# Altium PCB SC_generator.PcbDoc
Units mm, origin at the board's own origin, x right, y up, seen from the top; angles counter-clockwise.
Board outline 79.97 x 50 mm, 2 copper layers (Top Layer, Bottom Layer); 45 components, 27 nets, 157 pads, 46 vias.
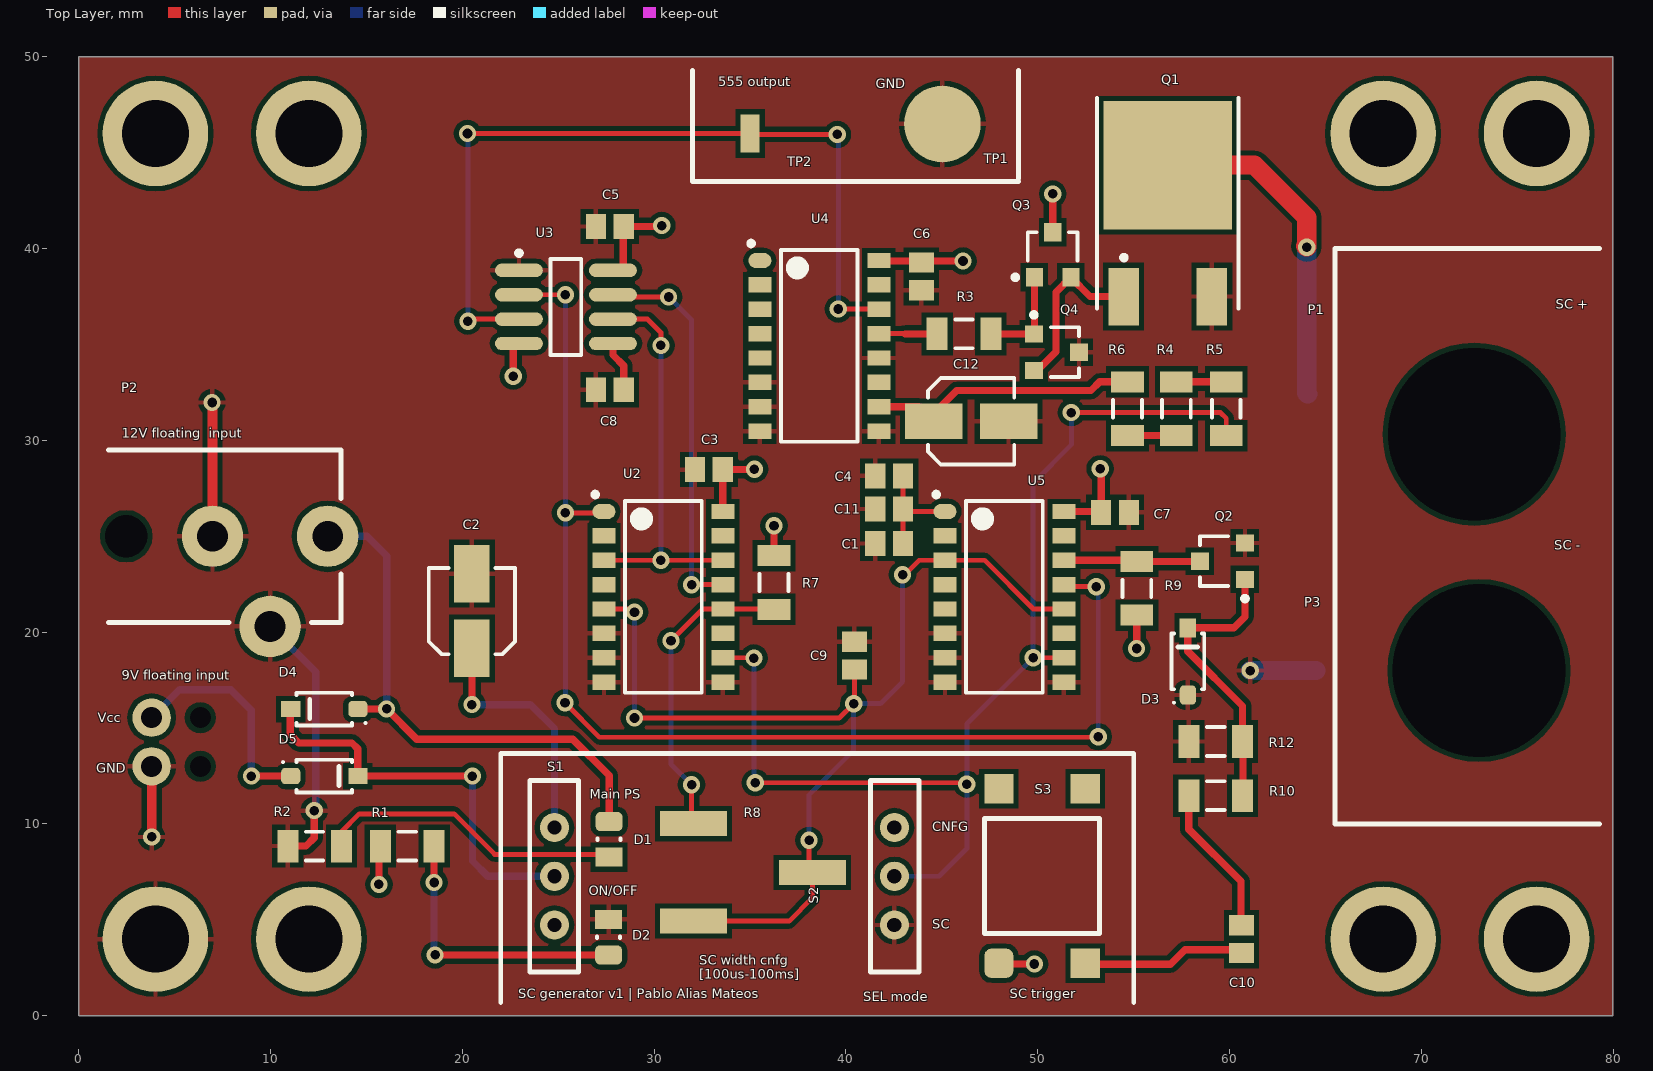
[diagram p0: Top Layer view]
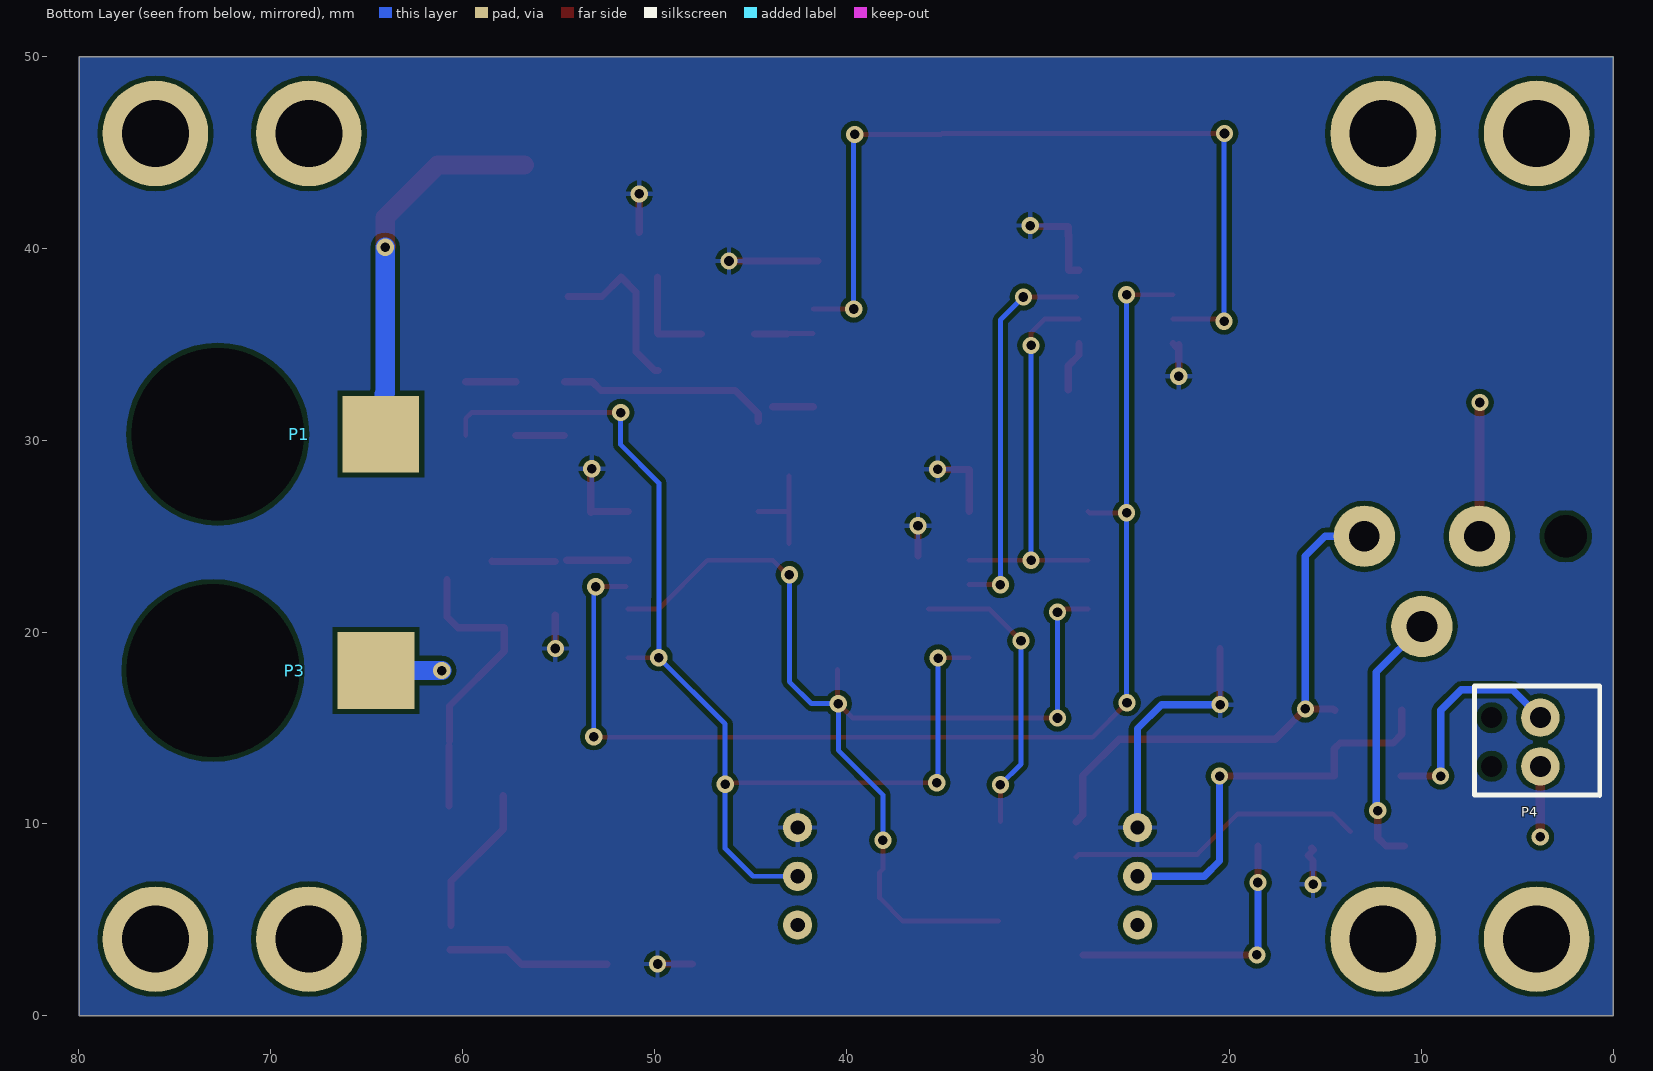
[diagram p1: Bottom Layer view, seen from below]
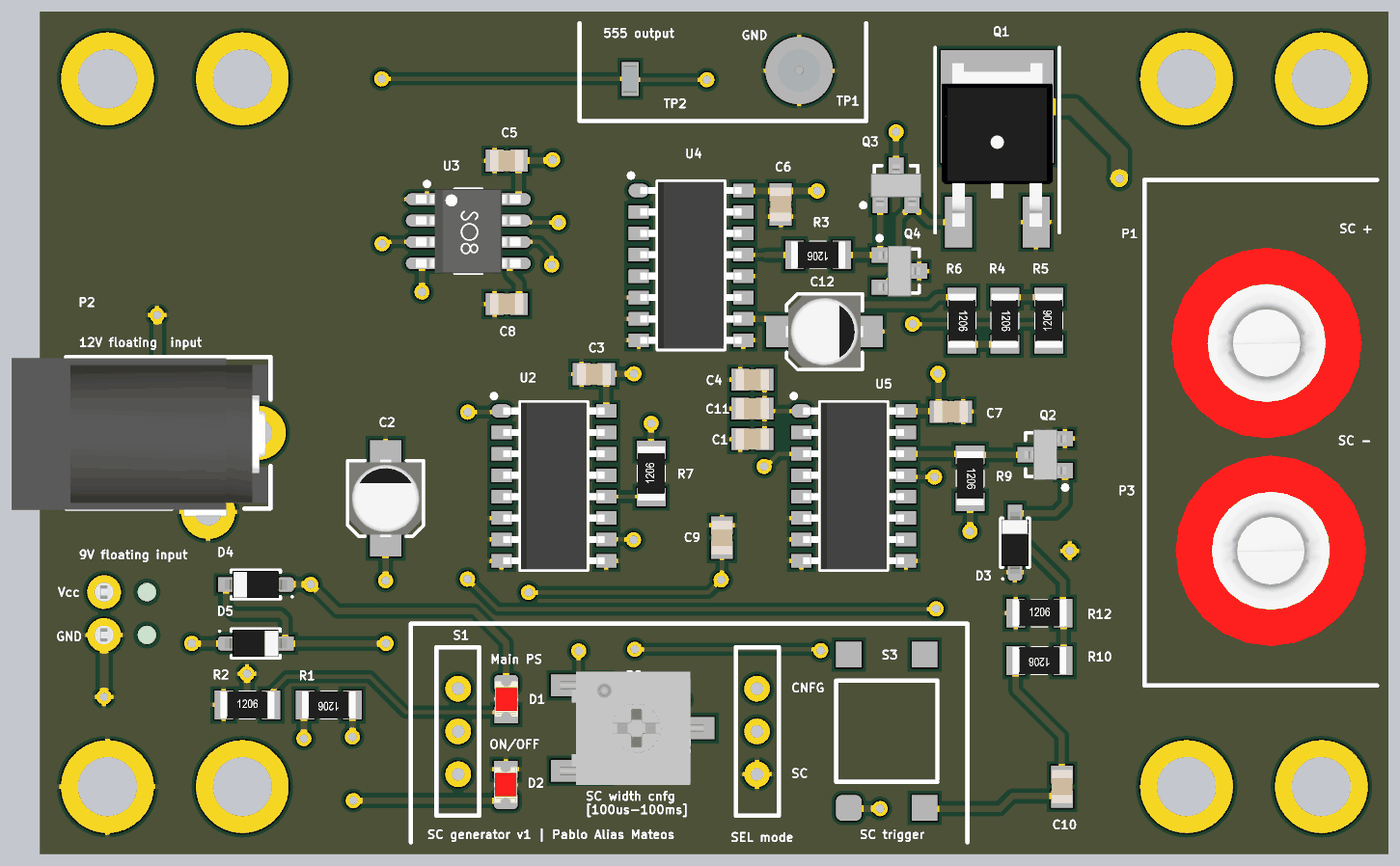
[diagram p2: 3D render of the assembled board from above, using the file's embedded part models]

## Layer stack, top to bottom
Top Solder: solder mask 0.0102, Solder Resist, Dk 3.5
Top Layer: signal copper 0.0356
Dielectric 1: dielectric 0.32, FR-4, Dk 4.8
Bottom Layer: signal copper 0.0356
Bottom Solder: solder mask 0.0102, Solder Resist, Dk 3.5

## Board outline
0,0 0,50 79.975,50 79.975,0

## Design rules (kind name [scope] priority, off if disabled: settings)
Clearance [All] p1: gap=0.254
PolygonConnect PolygonConnect_1 [All] p1: connectstyle=Relief reliefconductorwidth=0.254 reliefentries=4 polygonreliefangle="90 Angle" airgapwidth=0.254
PolygonConnect MOS_GND [HasFootprint('TO-252/DPAK')] p2: connectstyle=Relief reliefconductorwidth=0.508 reliefentries=4 polygonreliefangle="90 Angle" airgapwidth=0.254
RoutingVias [All] p1: holewidth=0.5 width=0.9 viastyle="Through Hole" minholewidth=0.5 minwidth=0.9 maxholewidth=0.5 maxwidth=0.9
SolderMaskExpansion [All] p1: expansion=0.102
Width [All] p1: maxlimit=1 minlimit=0.254 preferedwidth=0.381
30 further rules are at their usual default settings.

## Components (designator, comment, footprint, x,y, rotation, side; value= is the part's Value field where it differs from the comment)
C1 "Cap Semi" CAP_0805_L 42.25,24.625 r0 top
C2 "Cap Electrol" CAPAE5043X55M 20.498,21.104 r90 top
C3 "Cap Semi" CAP_0805_L 32.85,28.475 r0 top
C4 "Cap Semi" CAP_0805_L 42.25,28.15 r0 top
C5 "Cap Semi" CAP_0805_L 27.686,41.148 r0 top
C6 "Cap Semi" CAP_0805_L 43.925,38.55 r90 top
C7 "Cap Semi" CAP_0805_L 54.025,26.25 r180 top
C8 "Cap Semi" CAP_0805_L 27.686,32.639 r0 top
C9 "Cap Semi" CAP_0805_L 40.438,18.773 r270 top
C10 "Cap Semi" CAP_0805_L 60.617,3.995 r90 top
C11 "Cap Semi" CAP_0805_L 42.25,26.425 r0 top
C12 "Cap Electrol" CAPAE5043X55M 46.525,31 r0 top
D1 "CHIPLED OSRAM 0805" CHIPLED_0805_N 27.65,9.2 r270 top
D2 "CHIPLED OSRAM 0805" CHIPLED_0805_N 27.625,4.1 r90 top
D3 "1N4148W" SOD-123_M 57.825,18.475 r90 top
D4 "SBR0560S1Q-7" SOD-123_M 12.803,15.993 r180 top
D5 "SBR0560S1Q-7" SOD-123_M 12.8,12.5 r0 top
P1 "SKT_4mm" "4MM SAFETY JACK" 72.75,30.325 r180 top
P2 "JCK_F_5.5_2.1" PJ-059A 9.975,25 r0 top
P3 "SKT_4mm" "4MM SAFETY JACK" 73,18 r180 top
P4 "TERM BLOCK 2.54MM 2POS" "TERM BLOCK 2.54MM 2POS" 3.8,14.275 r270 bottom
Q1 "IPD12CN10NGATMA1" TO-252/DPAK 56.775,40.925 r0 top
Q2 "PMMT491A" SOT-23 59.625,23.7 r90 top
Q3 "PMMT491A" SOT-23 50.775,39.675 r0 top
Q4 "PBHV9115T" SOT-23 50.971,34.596 r270 top
R1 "Res semi" RES_1206_N 17.125,8.85 r180 top
R2 "Res semi" RES_1206_N 12.3,8.85 r0 top
R3 "Res semi" RES_1206_N 46.15,35.55 r180 top
R4 "Res semi" RES_1206_N 57.225,31.65 r270 top
R5 "Res semi" RES_1206_N 59.825,31.65 r90 top
R6 "Res semi" RES_1206_N 54.675,31.65 r270 top
R7 "Res semi" RES_1206_N 36.248,22.588 r90 top
R8 "Pot SMD" 3361P_POT 35.15,7.475 r270 top
R9 "Res semi" RES_1206_N 55.166,22.287 r270 top
R10 "Res semi" RES_1206_N 59.275,11.475 r180 top
R12 "Res semi" RES_1206_N 59.275,14.3 r0 top
S1 "SW SPST 500mA 24V" DIP_3x1_slide_switch 24.8,7.275 r270 top
S2 "SW SPST 500mA 24V" DIP_3x1_slide_switch 42.525,7.275 r90 top
S3 "BUTTON SPST" "BUTTON SPDT" 50.22,7.289 r180 top
TP1 "TEST_POINT" TP_SMD_pin 45.025,46.5 r0 top
TP2 "TEST_POINT" TP_SMD 35,46 r90 top
U2 "HEF4052BT,653" SO16_M 30.48,21.844 r0 top
U3 "LM555" SO-8_M 25.4,36.957 r0 top
U4 "HEF4052BT,653" SO16_M 38.608,34.93 r0 top
U5 "HEF4052BT,653" SO16_M 48.26,21.844 r0 top

## Footprints (in the part's own frame and the unit in brackets; to place one, negate y for a bottom-side part, rotate by r counter-clockwise, add the part's x,y. Pads: shape width x height; smd on the part's side, far side on the other; paste and mask are expansions set on the pad)
"4MM SAFETY JACK" [mm] "Banana Jack Connector Standard Banana Solder Cup"
  rect 4x4 smd far side: 1(8.5,0)
  round 7 hole 9 unplated mask+0.102: MH(0,0)
  body extent -5.65,-5.65 5.65,5.65, height 8.3
3361P_POT [mm] "3361P potentiometer SMD"
  rect 1.3x3.5 smd: 1(-2.54,-3.1) 2(0,3.1) 3(2.54,-3.1)
  body extent -3.34,-4.32 3.36,4.22, height 5.26
"BUTTON SPDT" [mm]
  rrect50% 1.524x1.524 smd: 1(2.25,4.55)
  rect 1.524x1.524 smd: 2(2.25,-4.55) 3(-2.25,4.55) 4(-2.25,-4.55)
  silkscreen extent -3,-3 3,3, body extent -3.05,-2.92 2.92,2.92, height 4.1
CAP_0805_L [mm]
  rect 1.05x1.3 smd: 1(-0.725,0) 2(0.725,0)
  body extent -1,-0.62 1,0.63, height 0.61
CAPAE5043X55M [mm] "Aluminum Electrolytic Capacitor, Body 4,30x4,30x5,50mm, IPC Low Density"
  rect 3x1.85 smd: 1(-1.95,0) 2(1.95,0)
  silkscreen extent -2.25,-2.25 2.25,2.25, body extent -2.3,-2.15 2.3,2.15, height 5.41
CHIPLED_0805_N [mm]
  rrect50% 1x1.4 smd: 1(-0.925,0)
  rect 1x1.4 smd: 2(0.925,0)
  silkscreen extent -0.05,-0.6 0.05,0.6, body extent -1.05,-0.67 1.05,0.68, height 0.9
DIP_3x1_slide_switch [mil] "Interruptor SIP, SPST, Pasante, Actuador Deslizante, 500 mA a 24 V, 2 vías, -40 ? +85°C, Ref 09.03290.01 EOZ"
  round 60 hole 29.53: 1(0,0) 2(-100,0) 3(100,0)
  silkscreen extent -197,-51 197,49, body extent -195,-50 195,50, height 209
PJ-059A [mm] "PJ-059A_jack_F_5.5_2.1"
  round 3.2 hole 1.6: 1(3,0) 2(-3,0) 3(0,-4.7)
  round 1 hole 2.2: MH(-7.5,0)
  silkscreen extent -8.42,-4.5 3.7,4.5, body extent -11.68,-4.97 3.53,4.42, height 11
RES_1206_N [mm]
  rect 1.1x1.7 smd: 1(-1.4,0) 2(1.4,0)
  silkscreen extent -0.45,-0.75 0.45,0.75, body extent -1.6,-0.8 1.6,0.8, height 0.6
SO16_M [mm] "16-Pin Small Outline Integrated Circuit 1.27 mm Pitch, IPC Low Density"
  oval 1.2x0.8 smd: 1(-3.1,4.445)
  rect 1.2x0.8 smd: 2(-3.1,3.175) 3(-3.1,1.905) 4(-3.1,0.635) 5(-3.1,-0.635) 6(-3.1,-1.905) 7(-3.1,-3.175) 8(-3.1,-4.445) 9(3.1,-4.445) 10(3.1,-3.175) 11(3.1,-1.905) 12(3.1,-0.635) 13(3.1,0.635) 14(3.1,1.905) 15(3.1,3.175) 16(3.1,4.445)
  silkscreen extent -3.68,-5 2,5.46, body extent -3,-4.95 3,4.95, height 1.4
SO-8_M [mm] "8-Pin Plastic Small Outline Integrated Circuit 1.27 mm Pitch, IPC Low Density"
  oval 2.5x0.7 smd: 1(-2.45,1.905) 2(-2.45,0.635) 3(-2.45,-0.635) 4(-2.45,-1.905) 5(2.45,-1.905) 6(2.45,-0.635) 7(2.45,0.635) 8(2.45,1.905)
  silkscreen extent -2.57,-2.5 0.8,2.93, body extent -3.1,-2.5 3.1,2.5, height 1.75
SOD-123_M [mm] "SOD-123, 2-Leads, Body 1,55x3,70mm, IPC Low Density"
  rrect50% 1x0.85 smd: 1(-1.75,0)
  rect 1x0.85 smd: 2(1.75,0)
  silkscreen extent -2.2,-0.85 1.45,0.85, body extent -1.85,-0.8 1.85,0.8, height 1.27
SOT-23 [mm] "SOT-23; 3 Leads; Body 3.1 x 2.5 mm, inc. leads (LxW max)"
  rect 0.9x0.95 smd: 1(-0.95,-1.175) 2(0.95,-1.175) 3(0,1.175)
  silkscreen extent -2.07,-1.3 1.3,1.18, body extent -1.5,-1.25 1.5,1.25, height 1.11
"TERM BLOCK 2.54MM 2POS" [mm] "2 Position Wire to Board Terminal Block Horizontal with Board 0.100\" (2.54mm) Through Hole"
  round 2 hole 1.1: 1(-1.27,0) 2(1.27,0)
  round 1 hole 1.1 unplated mask+0.102: MH1(-1.27,-2.54) MH2(1.27,-2.54)
  silkscreen extent -2.92,-3.43 2.79,3.1, body extent -2.77,-3.1 2.77,3.1, height 8.5
TO-252/DPAK [mm] "D-PAK/TO-252"
  rect 1.6x3 smd: 1(-2.3,-3.425) 3(2.3,-3.425)
  rect 6.7x6.7 smd: 2(0,3.425)
  silkscreen extent -3.68,-4.06 3.68,6.94, body extent -3.29,-3.7 3.29,6, height 2.3
TP_SMD [mm] "test point SMD, ring shape"
  rect 2x1 smd: 1(0,0)
  body extent -0.8,-0.5 0.8,0.5, height 1.15
TP_SMD_pin [mm] "TP SMD single pin"
  round 4 smd: 1(0,0)
  body extent -1.27,-1.27 1.27,1.27, height 4.32

## Part data
C1 C3 C4 C5 C6 C7 C8 C9 C10 C11: "Generic ceramic capacitor"
C2 C12: "Generic electrolitic capacitor"
D1 D2: library part "CHIPLED 0805"
D3: "Diodo de conmutación, 1N4148W-E3-08, 150mA, 75V, SOD-123, 2-Pines, Maximum of 50"
D4 D5: "Diodo Súper barrera Montaje en superficie 60V 500 mA SOD-123"
P1 P3: "Conector hembra de 4 mm Hirschmann 930176101, 30 V ac, 60 V dc, 32A, Rojo, Latón, Estaño, Hembra, Soldadura, 23.5mm"
P2: library part jack_female_5.5_2.1, "Power Barrel Connector Jack 2.10mm ID (0.083\"), 5.50mm OD (0.217\") Through Hole, Right Angle"
P4: "2 Position Wire to Board Terminal Block Horizontal with Board 0.100\" (2.54mm) Through Hole"
Q1: "Canal N Montaje en superficie 100V 67 A (Tc) 125 W (Tc) PG-TO252-3"
Q2 Q3: "Transistor de Unión Bipolar Único, NPN, 40 V, 250 mW, 1 A, 300 hFE"
Q4: "Transistor de Unión Bipolar Único, PNP, -150 V, 115 MHz, 300 mW, -1 A, 220 hFE"
R1 R2 R3 R4 R5 R6 R7 R9 R10 R12: "Generic resistor"
R8: "Generic pot SMD"
S1 S2: library part "SW SPST TH", "Interruptor SIP, SPST, Pasante, Actuador Deslizante, 500 mA a 24 V"
S3: "Interruptor táctil tipo Botón, Negro, contactos SPST-NA, Montaje superficial"
TP1 TP2: "Generic test point, several footprints"
U2 U4 U5: "IC MUX/DEMUX DUAL 4X1 16SOIC"
U3: "IC OSC SINGLE TIMER"

## Free pads (board coordinates)
  round 5.5 hole 3.5: MH1(4,4) MH1_C(12,4) MH2(68,4) MH2(76,4) MH3(76,46) MH3_C(68,46) MH4(4,46) MH4_C(12,46)

## Via types
v1: diameter 0.9, hole 0.5, Top Layer to Bottom Layer, 46 vias

## Nets (pads, with @x,y where several pads share a name; then routed paths per layer and width w, separated by ;. In a path a pad name is that pad's centre, name@x,y a point inside that pad or via, vN(x,y) a via of type N, cw(c..) or ccw(c..) an arc to the next point about the centre after c; other vN are vias at no path point)
555_MODE: R5.1 S2.1 U2.10 U5.10 | length 59.3
  Top Layer w0.254: U2.10 35.181,18.669 v1(35.2,18.65) ; v1(35.275,12.15) 46.225,12.15 v1(46.3,12.075) ; v1(49.756,18.669) U5.10 ; v1(51.75,31.45) 59.525,31.45 59.825,31.15 R5.1
  Bottom Layer w0.254: v1(35.2,18.65) 35.2,12.225 v1(35.275,12.15) ; S2.1 44.85,7.275 46.3,8.725 v1(46.3,12.075) 46.3,15.213 v1(49.756,18.669) 49.756,21.769 49.75,21.775 49.75,27.775 51.75,29.775 v1(51.75,31.45)
AUX_PS: D5.1 P4.1 | length 11.7
  Top Layer w0.381: v1(9,12.5) D5.1
  Bottom Layer w0.381: P4.1 5.255,17 7.925,17 9,15.925 v1(9,12.5)
DISCHARGE: U2.13 U3.7 | length 19.9
  Top Layer w0.254: U3.7@27.967,37.475 v1(30.75,37.475) ; v1(31.95,22.475) 31.954,22.479 U2.13
  Bottom Layer w0.254: v1(30.75,37.475) 31.95,36.275 v1(31.95,22.475)
GND: C1.1 C2.2 C3.1 C4.1 C5.1 C6.1 C7.1 C8.1 C9.1 C11.1 C12.2 D2.2 D3.1 P2.2 P2.3 P3.1 P4.2 pad.MH1 Q1.3 Q2.2 Q4.3 R2.1 R12.1 S2.2 TP1.1 U2.6 U2.7 U2.8 U2.9 U3.1 U4.6 U4.7 U4.8 U4.9 U4.12 U5.6 U5.7 U5.8 U5.9 | length 27.7
  Top Layer w0.381: R2.1 11.85,8.85 12.275,9.275 v1(12.275,10.7)
  Top Layer w0.508: v1(3.8,9.325) P4.2 ; v1(6.95,31.975) 6.975,31.95 P2.2
  Bottom Layer w0.381: P2.3 12.35,17.925 v1@12.35,10.7
  Bottom Layer w1: v1(61.075,18) P3.1
MAIN_PS: D1.1 D4.1 P2.1 | length 28.6
  Top Layer w0.381: D4.1@14.525,15.925 14.6,16 v1(16.05,16) 17.625,14.425 25.75,14.425 27.65,12.525 27.65,10.475 D1.1@28,10.125
  Bottom Layer w0.381: P2.1 15.025,25 16.05,23.975 v1(16.05,16)
NetC1_2: C1.2 C4.2 C11.2 U5.1 | length 5.1
  Top Layer w0.254: C1.2 C11.2 C4.2 ; C11.2@43,26.289 U5.1@44.586,26.289
NetC8_2: C8.2 U3.5 | length 2.6
  Top Layer w0.381: U3.5 27.85,34.45 28.411,33.889 C8.2
NetC9_2: C9.2 R8.2 R8.3 U2.5 U5.3 U5.12 | length 57
  Top Layer w0.254: U2.5 28.816,21.209 v1(28.975,21.05) ; v1(28.975,15.525) 39.65,15.525 v1(40.4,16.275) 40.438,16.313 C9.2 ; R8.3 37.035,4.935 38.25,6.15 R8.2 38.075,7.65 v1(38.075,9.15) ; v1(42.95,23) 43.064,23 43.813,23.749 U5.3 47.226,23.749 49.775,21.2 49.784,21.209 U5.12
  Bottom Layer w0.254: v1(28.975,15.525) v1(28.975,21.05) ; v1(38.075,9.15) 38.075,11.525 40.4,13.85 v1(40.4,16.275) 41.8,16.275 42.95,17.425 v1(42.95,23)
NetC10_1: C10.1 S3.3 | length 8.5
  Top Layer w0.381: S3.3@52.47,2.689 56.921,2.689 57.677,3.445 C10.1@60.65,3.445
NetC10_2: C10.2 R10.2 | length 7.9
  Top Layer w0.381: R10.2 57.875,9.725 60.592,7.008 ; C10.2@60.592,4.72 60.592,7.001
NetC12_1: C12.1 R6.1 U4.10 | length 13.3
  Top Layer w0.381: U4.10 C12.1@43.82,31.755 ; C12.1 44.575,31.4 45.775,32.6 52.775,32.6 53.225,33.05 R6.1
NetD1_2: D1.2 R2.2 | length 15.6
  Top Layer w0.254: R2.2@13.7,9.6 14.625,10.525 19.575,10.525 21.682,8.418 27.857,8.418 D1.2@28,8.275
NetD2_1: D2.1 R1.1 | length 14.7
  Top Layer w0.381: v1(18.525,6.95) R1.1 ; v1(18.575,3.175) D2.1
  Bottom Layer w0.381: v1@18.525,3.225 v1(18.525,6.95)
NetD3_2: D3.2 Q2.1 R10.1 R12.2 | length 15.4
  Top Layer w0.381: R12.2 60.675,16.15 57.825,19 D3.2 60.225,20.225 60.8,20.8 Q2.1 ; R10.1@60.7,10.95 R12.2@60.7,14.05
NetD4_2: D4.2 D5.2 S1.1 | length 21.5
  Top Layer w0.381: D4.2@11.025,15.925 11.025,14.675 11.475,14.225 14.25,14.225 14.55,13.925 D5.2 v1(20.525,12.5)
  Bottom Layer w0.381: v1(20.525,12.5) 20.525,8.075 21.325,7.275 S1.1
NetP1_1: P1.1 Q1.2 | length 17.7
  Top Layer w1: Q1.2 61.3,44.35 64.025,41.625 v1(64.025,40.075) v1@63.972,40.128
  Bottom Layer w1: v1(64.025,40.075) 64.025,32.475 64.075,32.425
NetQ1_1: Q1.1 Q3.2 Q4.2 | length 8.9
  Top Layer w0.381: Q4.2 49.971,33.646 50.95,34.625 50.95,37.725 Q3.2 52.725,37.5 Q1.1
NetQ2_3: Q2.3 R9.1 U5.14 | length 6.5
  Top Layer w0.381: U5.14 R9.1@54.576,23.749 ; R9.1 58.437,23.687 Q2.3
NetQ3_1: Q3.1 Q4.1 R3.1 | length 5.2
  Top Layer w0.381: R3.1 49.8,35.55 49.825,35.575 Q3.1
NetR3_2: R3.2 U4.13 | length 3
  Top Layer w0.254: U4.13 43.065,35.565
  Top Layer w0.381: 43.08,35.55 R3.2
NetR4_1: R4.1 R5.2 | length 2.6
  Top Layer w0.381: R4.1 R5.2
NetR4_2: R4.2 R6.2 | length 2.5
  Top Layer w0.381: R6.2 R4.2
NetR7_1: R7.1 R8.1 U2.12 | length 15.4
  Top Layer w0.254: v1(30.875,19.55) 32.534,21.209 U2.12 R7.1@35.709,21.209 ; R8.1@31.95,10.115 v1(31.95,12.05)
  Bottom Layer w0.254: v1(30.875,19.55) 30.875,13.125 v1(31.95,12.05)
NetTP2_1: TP2.1 U3.3 U4.14 | length 43
  Top Layer w0.254: v1(20.265,46) TP2.1 ; v1(20.289,36.216) 20.395,36.322 U3.3 ; TP2.1@35.05,45.95 v1(39.55,45.95) ; v1(39.6,36.85) 41.693,36.85 U4.14
  Bottom Layer w0.254: v1(20.265,46) 20.289,45.976 v1(20.289,36.216) ; v1(39.55,45.95) 39.6,45.9 v1(39.6,36.85)
THRESHOLD: U2.3 U2.14 U3.6 | length 20.9
  Top Layer w0.254: U2.3 U2.14 ; U3.6 29.653,36.322 30.35,35.625 v1(30.35,34.95)
  Bottom Layer w0.254: v1(30.35,23.75) v1(30.35,34.95)
TRIGGER: U2.1 U3.2 U5.13 | length 63.9
  Top Layer w0.254: U3.2 v1(25.371,37.592) ; v1(25.35,16.318) 27.143,14.525 53.125,14.525 v1(53.15,14.55) ; v1(25.371,26.221) 27.312,26.221 U2.1 ; U5.13@51.464,22.375 v1(53.05,22.375) v1@52.946,22.479
  Bottom Layer w0.254: v1(25.35,16.318) 25.371,16.296 v1(25.371,26.221) v1(25.371,37.592) ; v1(53.05,22.375) 53.15,22.275 v1(53.15,14.55)
VCC: C2.1 C3.2 C5.2 C6.2 C7.2 Q3.3 R1.2 R7.2 R9.2 S1.2 S2.3 S3.1 U2.16 U3.4 U3.8 U4.16 U5.16 | length 41.7
  Top Layer w0.381: v1(15.65,6.85) 15.65,8.1 15.912,8.362 15.625,8.65 R1.2@15.725,8.75 ; v1(20.498,16.225) C2.1 ; v1(22.65,33.35) 22.65,35.002 22.775,34.877 U3.4 ; U3.8 28.384,38.862 28.384,40.695 28.411,40.668 C5.2 v1@30.4,41.148 ; U2.16@33.575,26.294 C3.2 v1(35.225,28.5) ; R7.2 v1(36.248,25.552) ; U4.16@41.465,39.35 v1(46.1,39.35) ; S3.1@48.009,2.7 v1(49.825,2.7) ; Q3.3 v1(50.775,42.85) ; U5.16 C7.2@53.261,26.289 ; C7.2 v1@53.3,28.475 ; v1(55.15,19.15) 55.166,19.166 R9.2
  Bottom Layer w0.381: v1(20.498,16.225) 23.55,16.225 24.8,14.975 S1.2
  other v1: 53.25,28.525 30.4,41.2
pads on no net: P1.MH P2.MH P3.MH P4.MH1 P4.MH2 S1.3 S3.2 S3.4 U2.2 U2.4 U2.11 U2.15 U4.1 U4.2 U4.3 U4.4 U4.5 U4.11 U4.15 U5.2 U5.4 U5.5 U5.11 U5.15

## Polygon pours and split planes (outlines as drawn)
GND on Top Layer "GND" (solid, pour order 0): 0,0 0,50 80,50 80,0
VCC on Bottom Layer "VCC" (solid, pour order 2): 0,0 0,50 80,50 80,0

## Silkscreen, mask and mechanical layers (free items; w line width, h text height)
Top Overlay:
  lines w0.254: 22,0.7 22,13.675 55,13.675 55,0.7 ; 32,49.3 32,43.5 49,43.5 ; 49,43.65 49,49.3 ; 79.3,10 65.5,10 65.5,40 79.3,40
  text "555 output" at 33.35,48.475 h0.5
  text "GND" at 41.55,48.35 h0.5
  text "SC +" at 77,36.875 h0.5
  text "12V floating  input" at 2.25,30.125 h0.5
  text "SC -" at 76.925,24.3 h0.5
  text "9V floating input" at 2.25,17.525 h0.5
  text "Vcc" at 1,15.3 h0.5
  text "GND" at 0.9,12.675 h0.5
  text "Main PS" at 26.65,11.325 h0.5
  text "CNFG" at 44.5,9.625 h0.5
  text "ON/OFF" at 26.6,6.275 h0.5
  text "SC" at 44.5,4.55 h0.5
  text "SC width cnfg / [100us-100ms]" at 32.35,1.925 h0.5
  text "SC generator v1 | Pablo Alias Mateos" at 22.9,0.925 h0.5
  text "SC trigger" at 48.55,0.925 h0.5
  text "SEL mode" at 40.9,0.758 h0.5